# EAGLE board STM32F446RC (EAGLE 9.2.0)
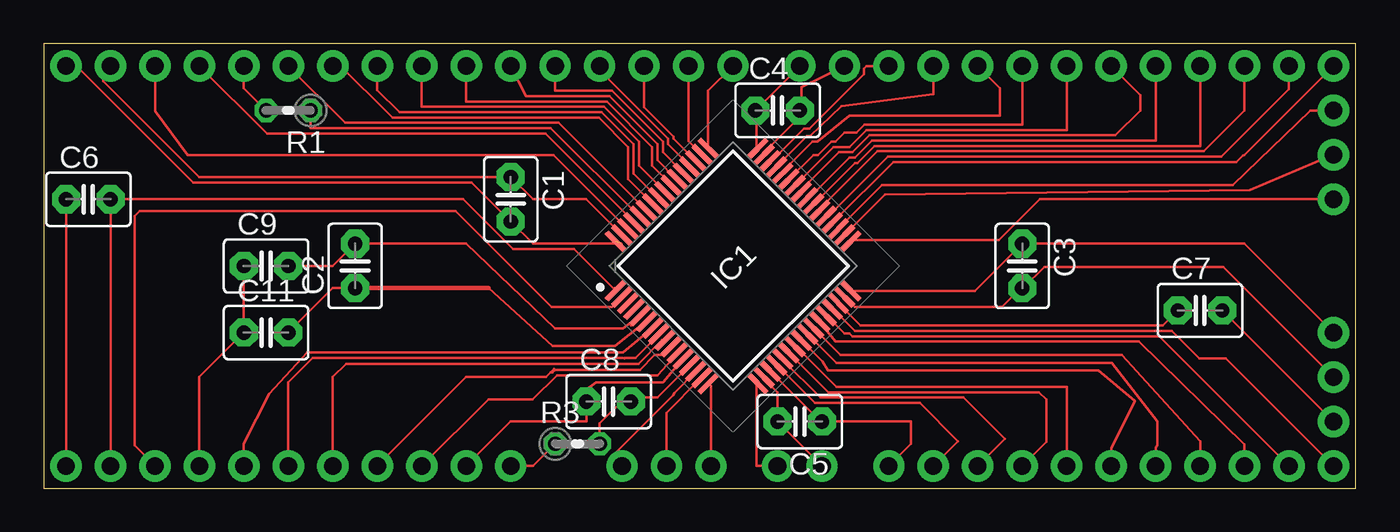
[diagram p0: board, top side]
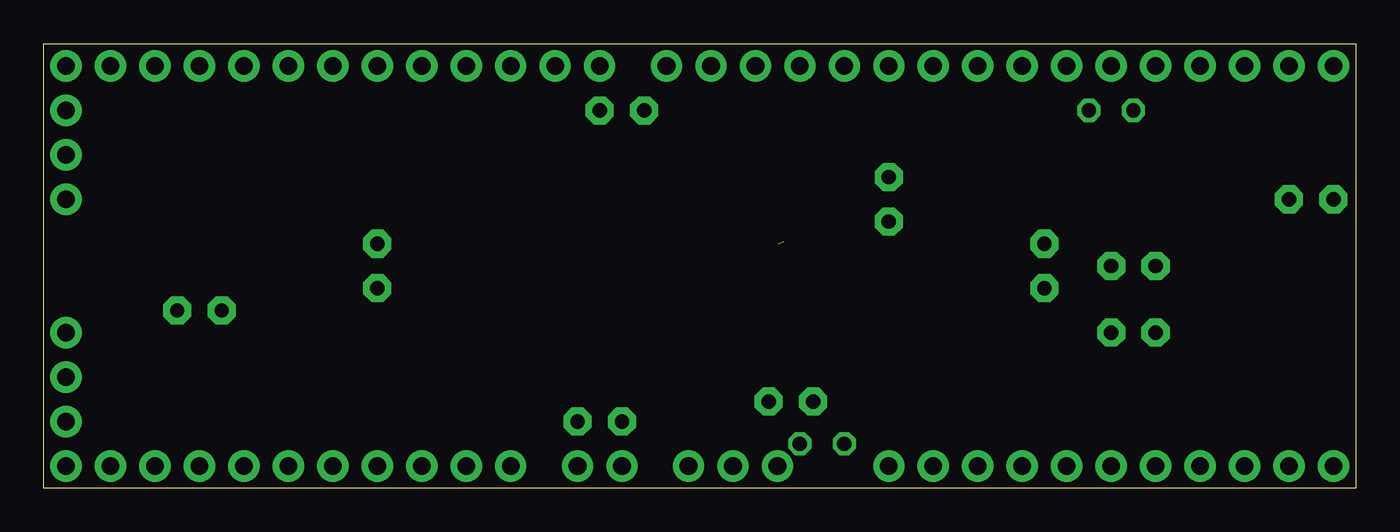
[diagram p1: board, bottom side, seen from below]

Size 74.93 x 25.4 mm. Coordinates in mm from the lower left corner, seen from the top.
Outline: 0,0 74.93,0 74.93,25.4 0,25.4 0,0
Copper layers (1*16): Top 0.035mm / dielectric 1.5mm / Bottom 0.035mm
Design rules "default": minimum track width 6mil, minimum drill 0.35mm, track to track 6mil, track to pad 6mil, pad to pad 6mil, via to via 6mil, smd to smd 6mil, copper to edge 40mil, drill to drill 6mil, minimum pad ring 10mil, minimum via ring 8mil, stop-mask expansion 4mil, vias tented up to drill 0mil, thermal gap 10mil

## Footprints (pad centres in the part's own frame; a part is rotated, then mirrored left to right if it is on the bottom)
C2.5-3 = drill 0.813 pad 1.6 octagon: 1 -1.27,0; 2 1.27,0
QFP50P1200X1200X160-64N = smd 1.475 x 0.3: 1 -5.738,3.75; 2 -5.738,3.25; 3 -5.738,2.75; 4 -5.738,2.25; 5 -5.738,1.75; 6 -5.738,1.25; 7 -5.738,0.75; 8 -5.738,0.25; 9 -5.738,-0.25; 10 -5.738,-0.75; 11 -5.738,-1.25; 12 -5.738,-1.75; 13 -5.738,-2.25; 14 -5.738,-2.75; 15 -5.738,-3.25; 16 -5.738,-3.75; 33 5.738,-3.75; 34 5.738,-3.25; 35 5.738,-2.75; 36 5.738,-2.25; 37 5.738,-1.75; 38 5.738,-1.25; 39 5.738,-0.75; 40 5.738,-0.25; 41 5.738,0.25; 42 5.738,0.75; 43 5.738,1.25; 44 5.738,1.75; 45 5.738,2.25; 46 5.738,2.75; 47 5.738,3.25; 48 5.738,3.75 | smd 0.3 x 1.475: 17 -3.75,-5.738; 18 -3.25,-5.738; 19 -2.75,-5.738; 20 -2.25,-5.738; 21 -1.75,-5.738; 22 -1.25,-5.738; 23 -0.75,-5.738; 24 -0.25,-5.738; 25 0.25,-5.738; 26 0.75,-5.738; 27 1.25,-5.738; 28 1.75,-5.738; 29 2.25,-5.738; 30 2.75,-5.738; 31 3.25,-5.738; 32 3.75,-5.738; 49 3.75,5.738; 50 3.25,5.738; 51 2.75,5.738; 52 2.25,5.738; 53 1.75,5.738; 54 1.25,5.738; 55 0.75,5.738; 56 0.25,5.738; 57 -0.25,5.738; 58 -0.75,5.738; 59 -1.25,5.738; 60 -1.75,5.738; 61 -2.25,5.738; 62 -2.75,5.738; 63 -3.25,5.738; 64 -3.75,5.738
1X1-HEADER-HOLE = drill 1.016 pad 1.778: 1 0,0
0204V = drill 0.813 octagon: 1 -1.27,0; 2 1.27,0

## Placement (x,y rotation side)
C1  100n+1u  [C2.5-3]  26.67,16.51 270 top
C2  20p  [C2.5-3]  17.78,12.7 90 top
C3  100n+1u  [C2.5-3]  55.88,12.7 270 top
C4  100n+1u  [C2.5-3]  41.91,21.59 0 top
C5  100n+1u  [C2.5-3]  43.18,3.81 180 top
C6  100n+1u  [C2.5-3]  2.54,16.51 0 top
C7  2.2U  [C2.5-3]  66.04,10.16 0 top
C8  100n+1u  [C2.5-3]  32.26,4.95 0 top
C9  20p  [C2.5-3]  12.7,12.7 0 top
C11  20p  [C2.5-3]  12.7,8.89 0 top
IC1  STM32F446RCT6  [QFP50P1200X1200X160-64N]  39.37,12.7 45 top
JP1  [1X1-HEADER-HOLE]  71.12,24.13 0 top
JP2  [1X1-HEADER-HOLE]  66.04,24.13 0 top
JP3  [1X1-HEADER-HOLE]  19.05,1.27 0 top
JP4  [1X1-HEADER-HOLE]  21.59,1.27 0 top
JP5  [1X1-HEADER-HOLE]  31.75,24.13 0 top
JP6  [1X1-HEADER-HOLE]  73.66,21.59 0 top
JP7  [1X1-HEADER-HOLE]  3.81,1.27 0 top
JP9  [1X1-HEADER-HOLE]  55.88,1.27 0 top
JP10  [1X1-HEADER-HOLE]  73.66,24.13 0 top
JP11  [1X1-HEADER-HOLE]  58.42,1.27 0 top
JP12  [1X1-HEADER-HOLE]  60.96,1.27 0 top
JP13  [1X1-HEADER-HOLE]  73.66,19.05 0 top
JP14  [1X1-HEADER-HOLE]  73.66,1.27 0 top
JP15  [1X1-HEADER-HOLE]  68.58,24.13 0 top
JP16  [1X1-HEADER-HOLE]  71.12,1.27 0 top
JP17  [1X1-HEADER-HOLE]  68.58,1.27 0 top
JP18  [1X1-HEADER-HOLE]  73.66,16.51 0 top
JP19  [1X1-HEADER-HOLE]  53.34,1.27 0 top
JP20  [1X1-HEADER-HOLE]  44.45,1.27 0 top
JP21  [1X1-HEADER-HOLE]  50.8,1.27 0 top
JP22  [1X1-HEADER-HOLE]  66.04,1.27 0 top
JP23  [1X1-HEADER-HOLE]  63.5,1.27 0 top
JP24  [1X1-HEADER-HOLE]  41.91,1.27 0 top
JP25  [1X1-HEADER-HOLE]  50.8,24.13 0 top
JP26  [1X1-HEADER-HOLE]  6.35,1.27 0 top
JP27  [1X1-HEADER-HOLE]  16.51,1.27 0 top
JP28  [1X1-HEADER-HOLE]  60.96,24.13 0 top
JP29  [1X1-HEADER-HOLE]  13.97,1.27 0 top
JP30  [1X1-HEADER-HOLE]  63.5,24.13 0 top
JP31  [1X1-HEADER-HOLE]  58.42,24.13 0 top
JP32  [1X1-HEADER-HOLE]  53.34,24.13 0 top
JP33  [1X1-HEADER-HOLE]  55.88,24.13 0 top
JP34  [1X1-HEADER-HOLE]  33.02,1.27 0 top
JP35  [1X1-HEADER-HOLE]  35.56,1.27 0 top
JP36  [1X1-HEADER-HOLE]  38.1,1.27 0 top
JP37  [1X1-HEADER-HOLE]  34.29,24.13 0 top
JP38  [1X1-HEADER-HOLE]  26.67,24.13 0 top
JP39  [1X1-HEADER-HOLE]  29.21,24.13 0 top
JP40  [1X1-HEADER-HOLE]  21.59,24.13 0 top
JP41  [1X1-HEADER-HOLE]  19.05,24.13 0 top
JP42  [1X1-HEADER-HOLE]  16.51,24.13 0 top
JP43  [1X1-HEADER-HOLE]  13.97,24.13 0 top
JP44  [1X1-HEADER-HOLE]  24.13,24.13 0 top
JP45  [1X1-HEADER-HOLE]  36.83,24.13 0 top
JP46  [1X1-HEADER-HOLE]  8.89,24.13 0 top
JP47  [1X1-HEADER-HOLE]  6.35,24.13 0 top
JP48  [1X1-HEADER-HOLE]  48.26,1.27 0 top
JP49  [1X1-HEADER-HOLE]  73.66,3.81 0 top
JP50  [1X1-HEADER-HOLE]  73.66,6.35 0 top
JP51  [1X1-HEADER-HOLE]  73.66,8.89 0 top
JP52  [1X1-HEADER-HOLE]  45.72,24.13 0 top
JP53  [1X1-HEADER-HOLE]  43.18,24.13 0 top
JP54  [1X1-HEADER-HOLE]  48.26,24.13 0 top
JP55  [1X1-HEADER-HOLE]  39.37,24.13 90 top
JP56  [1X1-HEADER-HOLE]  11.43,24.13 0 top
JP57  [1X1-HEADER-HOLE]  3.81,24.13 0 top
JP58  [1X1-HEADER-HOLE]  1.27,24.13 0 top
JP59  [1X1-HEADER-HOLE]  1.27,1.27 0 top
JP61  [1X1-HEADER-HOLE]  26.67,1.27 0 top
JP62  [1X1-HEADER-HOLE]  24.13,1.27 0 top
JP63  [1X1-HEADER-HOLE]  11.43,1.27 0 top
JP65  [1X1-HEADER-HOLE]  8.89,1.27 0 top
R1  10k  [0204V]  13.97,21.59 180 top
R3  [0204V]  30.48,2.54 0 top

## Library data of the parts
C1-C9 C11 = capacitor-wima
IC1 = STM32F446RCT6; DESCRIPTION: STMICROELECTRONICS - STM32F446RCT6 - MCU, 32BIT, CORTEX-M4, 180MHZ, LQFP-64; HEIGHT: 1.6mm; MANUFACTURER_NAME: STMicroelectronics; MANUFACTURER_PART_NUMBER: STM32F446RCT6; MOUSER_PART_NUMBER: 511-STM32F446RCT6; MOUSER_PRICE-STOCK: https://www.mouser.com/Search/Refine.aspx?Keyword=511-STM32F446RCT6
JP1-JP7 JP9-JP59 JP61-JP63 JP65 = F405Pill
R1 R3 = rcl; SPICEPREFIX: R

## Nets
N$1: C3.2 IC1.31 JP50.1
N$2: C8.2 IC1.13 R3.2
N$3: IC1.7 JP63.1
N$4: C5.2 IC1.18 JP20.1
N$5: IC1.60 R1.1
N$6: C1.2 IC1.64 JP58.1
N$7: C2.1 C11.2 IC1.6
N$8: C1.1 IC1.63 JP57.1
N$9: IC1.59 JP43.1
N$10: IC1.58 JP42.1
N$11: IC1.24 JP12.1
N$12: IC1.25 JP23.1
N$13: IC1.26 JP22.1
N$14: IC1.27 JP17.1
N$15: IC1.28 JP16.1
N$16: IC1.29 JP14.1
N$17: IC1.23 JP11.1
N$18: IC1.22 JP9.1
N$19: IC1.21 JP19.1
N$20: IC1.17 JP24.1
N$21: IC1.33 JP18.1
N$22: IC1.34 JP13.1
N$23: IC1.35 JP6.1
N$24: IC1.36 JP10.1
N$25: IC1.37 JP1.1
N$26: IC1.16 JP36.1
N$27: IC1.15 JP35.1
N$28: IC1.14 JP34.1
N$29: IC1.11 JP4.1
N$30: IC1.10 JP3.1
N$31: IC1.9 JP27.1
N$32: IC1.8 JP29.1
N$33: IC1.2 JP26.1
N$34: IC1.38 JP15.1
N$35: IC1.39 JP2.1
N$36: IC1.40 JP30.1
N$37: IC1.41 JP28.1
N$38: IC1.42 JP31.1
N$39: IC1.43 JP33.1
N$40: IC1.44 JP32.1
N$41: IC1.45 JP25.1
N$42: IC1.57 JP41.1
N$43: IC1.56 JP40.1
N$44: IC1.55 JP44.1
N$45: IC1.54 JP38.1
N$46: IC1.53 JP39.1
N$47: IC1.52 JP5.1
N$48: IC1.51 JP37.1
N$49: IC1.50 JP45.1
N$50: IC1.61 JP46.1
N$51: IC1.62 JP47.1
N$52: IC1.20 JP21.1
N$53: C2.2 C9.2 IC1.5
N$54: C7.2 JP49.1
N$55: C3.1 IC1.32 JP51.1
N$56: C4.2 IC1.47 JP52.1
N$57: JP56.1 R1.2
N$58: C6.2 IC1.1 JP7.1
N$59: C8.1 IC1.12 JP62.1
N$60: JP61.1 R3.1
N$63: C9.1 C11.1 JP65.1
N$64: C5.1 IC1.19 JP48.1
N$66: C7.1 IC1.30
N$67: C6.1 JP59.1
N$89: C4.1 IC1.48 JP53.1
SWCLK: IC1.49 JP55.1
SWDIO: IC1.46 JP54.1

## Tracks (layer width: path | path; a pad name or v marks a point on that pad's centre or on a via)
N$1
  Top 0.152: IC1.31 45.87,10.82 46.33,10.36 54.71,10.36 55.78,11.43 C3.2 55.93,11.43 57.15,12.65 67.36,12.65 JP50.1
N$2
  Top 0.152: IC1.13 36.88,7.01 35.05,5.18 33.07,5.18 C8.2 33.07,5.03 31.75,3.71 R3.2
N$3
  Top 0.152: IC1.7 34.75,9.14 33.07,7.75 15.04,7.75 12.86,5.4 11.43,2.54 JP63.1
N$4
  Top 0.152: IC1.18 41.15,6.25 41.91,5.49 C5.2 JP20.1
N$5
  Top 0.152: IC1.60 33.98,15.54 28.96,20.57 15.24,20.57 R1.1
N$6  (1 unrouted)
  Top 0.152: 32.61,14.02 IC1.64 | 26.67,15.29 C1.2 | C1.2 27.94,13.97 32.97,13.97 32.99,13.94 | JP58.1 1.88,24.13 8.53,17.48 24.43,17.48 C1.2
  Bottom 0.152: 1.37,24.03 JP58.1 | 26.67,15.29 C1.2
N$7
  Top 0.152: IC1.6 34.29,9.45 32.61,8.13 29.06,8.13 25.4,11.43 | 14.02,8.99 C11.2 16.51,11.43 C2.1
  Top 0.254: 25.4,11.43 C2.1
N$8
  Top 0.152: 32.92,14.48 IC1.63 30.96,16.51 27.94,16.51 C1.1 | C1.1 26.67,17.73 | 26.67,17.88 C1.1 | C1.1 8.89,17.78 3.4,23.27 3.4,23.72 JP57.1
N$9
  Top 0.152: JP43.1 17.22,20.88 29.41,20.88 34.29,16 IC1.59
N$10
  Top 0.152: IC1.58 34.75,16.31 33.38,17.68 33.38,19.51 31.7,21.18 19.91,21.18 16.74,24.36 JP42.1
N$11
  Top 0.152: IC1.24 44.47,7.25 44.79,6.73 60.23,6.73 62.31,4.98 60.96,2.29 JP12.1
N$12
  Top 0.152: IC1.25 45.29,7.16 61.01,7.16 63.6,3.81 63.6,2.44 63.5,2.34 JP23.1
N$13
  Top 0.152: IC1.26 45.51,7.62 61.57,7.62 66.04,2.67 JP22.1
N$14
  Top 0.152: IC1.27 44.35,9.45 45.21,8.38 62.53,8.38 68.58,2.5 JP17.1
N$15
  Top 0.152: JP16.1 63.7,8.69 46.18,8.69 46.02,8.84 45.72,8.84 44.81,9.75 IC1.28
N$16
  Top 0.152: JP14.1 67.51,7.42 65.99,7.42 64.41,8.99 46.33,8.99 45.11,10.21 IC1.29
N$17
  Top 0.152: JP11.1 58.42,5.79 45.26,5.79 42.98,8.08 IC1.23
N$18
  Top 0.152: IC1.22 42.67,7.62 44.81,5.49 56.84,5.49 57.25,5.08 57.25,2.64 JP9.1
N$19
  Top 0.152: IC1.21 42.22,7.32 44.35,5.18 52.53,5.18 54.89,2.82 JP19.1
N$20
  Top 0.152: JP24.1 40.69,1.27 40.69,5.94 IC1.17
N$21
  Top 0.152: JP18.1 56.9,16.51 54.56,14.17 46.18,14.17 IC1.33
N$22
  Top 0.152: IC1.34 45.89,14.62 45.89,14.64 48.03,16.77 68.89,17.03 73.59,19.05 JP13.1
N$23
  Top 0.152: JP6.1 72.34,21.59 67.92,17.32 47.88,17.32 45.47,14.94 IC1.35
N$24
  Top 0.152: IC1.36 45.11,15.24 48.51,18.64 68.12,18.64 68.48,19 68.58,19.05 JP10.1
N$25
  Top 0.152: JP1.1 71.12,22.81 67.26,18.95 48.21,18.95 44.81,15.54 IC1.37
N$26
  Top 0.152: IC1.16 38.1,5.86 JP36.1
N$27
  Top 0.152: JP35.1 35.56,4.32 37.49,6.25 IC1.15
N$28
  Top 0.152: IC1.14 36.02,5.46 35.95,5.31 32.65,2.02 JP34.1
N$29
  Top 0.152: JP4.1 25.4,5.08 27.91,5.08 29.31,6.45 35.05,6.45 36.12,7.62 IC1.11
N$30
  Top 0.152: 35.97,8.23 IC1.10 35.34,7.61 34.89,7.61 34.04,6.76 29.19,6.76 29.1,6.67 29.04,6.62 28.94,6.62 | JP3.1 24.13,6.35 28.68,6.35 28.94,6.62 | 28.94,6.62 29.14,6.81
  Bottom 0.152: 19.05,1.37 JP3.1
N$31
  Top 0.152: 35.36,8.38 IC1.9 35.32,8.47 33.97,7.12 17.28,7.12 16.51,6.35 JP27.1
N$32
  Top 0.152: 35.41,9.04 35.2,8.84 | 35.2,8.84 IC1.8 | JP29.1 13.97,6.05 15.36,7.44 33.06,7.44 33.17,7.43 33.18,7.44 33.81,7.44 35.2,8.84
N$33
  Top 0.152: IC1.2 32.92,10.82 32.46,10.36 29.01,10.36 23.52,15.85 5.49,15.85 5.18,15.54 5.18,2.44 JP26.1
N$34
  Top 0.152: JP15.1 68.58,21.59 66.24,19.25 47.6,19.25 44.35,16 IC1.38
N$35
  Top 0.152: JP2.1 66.04,19.56 47.45,19.56 46.48,18.59 46.33,18.59 44.04,16.31 IC1.39
N$36
  Top 0.152: JP30.1 63.5,19.86 47.3,19.86 46.33,18.9 46.02,18.9 43.74,16.61 IC1.40
N$37
  Top 0.152: JP28.1 62.64,22.45 62.64,21.59 61.21,20.17 47.14,20.17 46.18,19.2 45.41,19.2 43.28,17.07 IC1.41
N$38
  Top 0.152: IC1.42 42.98,17.37 45.11,19.51 46.02,19.51 46.99,20.47 58.42,20.47 JP31.1
N$39
  Top 0.152: 42.52,17.53 IC1.43 43.95,19.05 44.22,19.05 44.98,19.81 45.21,19.81 45.72,20.32 46.41,20.32 46.86,20.78 55.88,20.78 JP33.1
  Bottom 0.152: JP33.1 55.88,24.08
N$40
  Top 0.152: IC1.44 42.22,18.14 43.89,19.81 44.2,19.81 46.03,21.29 54.61,21.29 54.61,22.86 JP32.1
N$41
  Top 0.152: IC1.45 41.91,18.44 43.59,20.12 43.76,20.12 45.57,21.82 50.8,22.52 JP25.1
N$42
  Top 0.152: JP41.1 19.05,22.76 20.32,21.49 31.85,21.49 33.68,19.66 33.68,17.98 35.05,16.61 IC1.57
N$43
  Top 0.152: IC1.56 35.36,17.07 33.98,18.44 33.98,19.81 32,21.79 21.59,21.79 JP40.1
N$44
  Top 0.152: JP44.1 24.13,22.1 32.16,22.1 34.75,19.51 34.75,18.44 35.81,17.37 IC1.55
N$45
  Top 0.152: IC1.54 36.12,17.68 35.05,18.75 35.05,19.66 32.31,22.4 27.53,22.4 JP38.1
N$46
  Top 0.152: IC1.53 36.42,18.14 35.36,19.2 35.36,19.81 32.46,22.71 29.21,22.71 JP39.1
N$47
  Top 0.152: JP5.1 31.75,23.88 35.66,19.96 35.66,19.66 36.88,18.44 IC1.52
N$48
  Top 0.152: IC1.51 37.19,18.75 35.97,19.96 35.97,20.09 34.29,21.77 JP37.1
N$49
  Top 0.152: JP45.1 36.83,19.84 IC1.50
N$50
  Top 0.152: IC1.61 33.68,15.24 28.65,20.27 12.75,20.27 JP46.1
N$51
  Top 0.152: IC1.62 33.22,14.94 29.11,19.05 8.23,19.05 6.35,21.54 JP47.1
N$52
  Top 0.152: IC1.20 41.91,7.01 44.04,4.88 50.04,4.88 52.22,2.69 JP21.1
N$53
  Top 0.152: 33.53,9.3 33.98,9.75 IC1.5 33.09,9.14 29.21,9.14 24.13,13.97 C2.2 16.51,12.7 C9.2 14.02,12.8
N$54
  Top 0.152: JP49.1 C7.2
  Bottom 0.152: JP49.1 73.61,3.91
N$55
  Top 0.152: IC1.32 46.18,11.28 53.19,11.28 C3.1 68.58,13.97 JP51.1
N$56
  Top 0.152: IC1.47 41.15,19.2 43.13,21.18 43.13,21.49 C4.2 43.28,21.64 43.28,22.91 JP52.1
N$57
  Top 0.152: JP56.1 11.43,22.86 R1.2
  Bottom 0.152: 11.53,24.08 JP56.1
N$58
  Top 0.152: 32.61,11.43 IC1.1 30.29,13.66 26.79,13.66 23.95,16.51 C6.2 JP7.1
N$59
  Top 0.152: IC1.12 36.42,7.32 35.36,6.04 31.55,6.04 30.87,5.58 30.99,5.52 30.99,5.08 C8.1 | C8.1 30.99,3.81 26.67,3.81 JP62.1 24.18,1.37 | 30.48,5.03 C8.1
N$60
  Top 0.152: 29.11,2.54 R3.1 27.94,1.27 JP61.1
N$63
  Top 0.152: C9.1 C11.1 8.89,6.35 JP65.1
N$64
  Top 0.152: IC1.19 41.6,6.55 44.35,3.81 C5.1 49.53,3.81 49.53,2.54 JP48.1
N$66
  Top 0.152: IC1.30 45.41,10.52 46.63,9.3 63.91,9.3 C7.1
N$67
  Top 0.152: C6.1 JP59.1
  Bottom 0.152: JP59.1 1.17,1.37
N$89
  Top 0.152: IC1.48 40.69,19.51 40.69,21.49 C4.1 JP53.1
SWCLK
  Top 0.152: JP55.1 37.95,22.71 37.95,19.51 IC1.49
SWDIO
  Top 0.152: IC1.46 41.6,18.75 43.42,20.56 43.73,20.56 46.84,23.67 46.84,23.98 46.99,24.13 JP54.1